# EAGLE board BMS ERROR Detection (EAGLE 8.6.2)
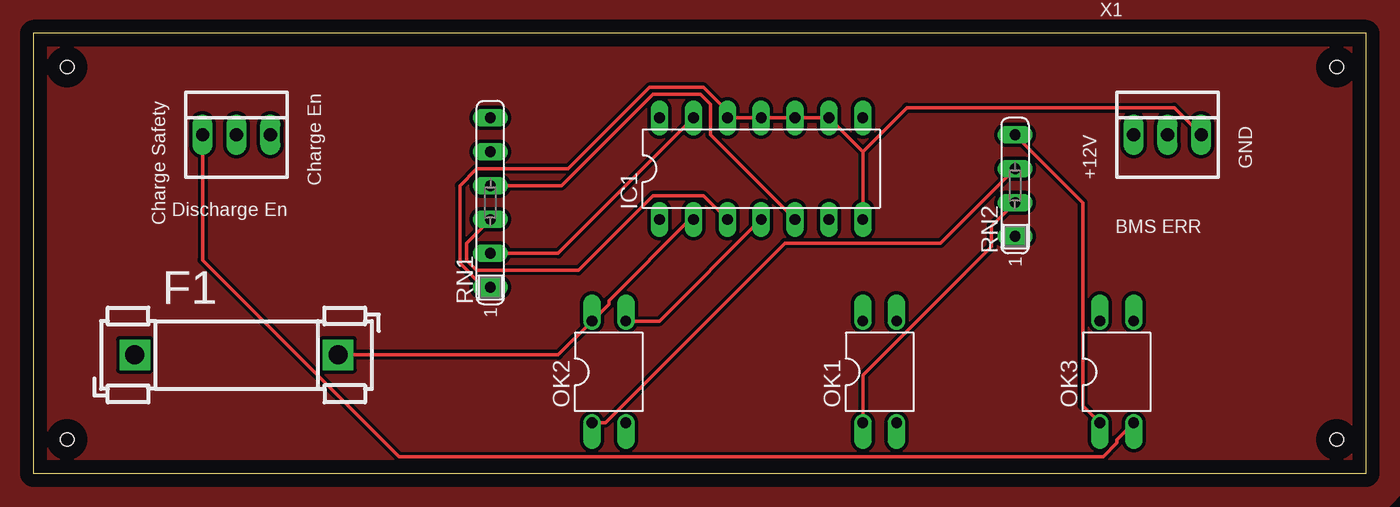
[diagram p0: board, top side]
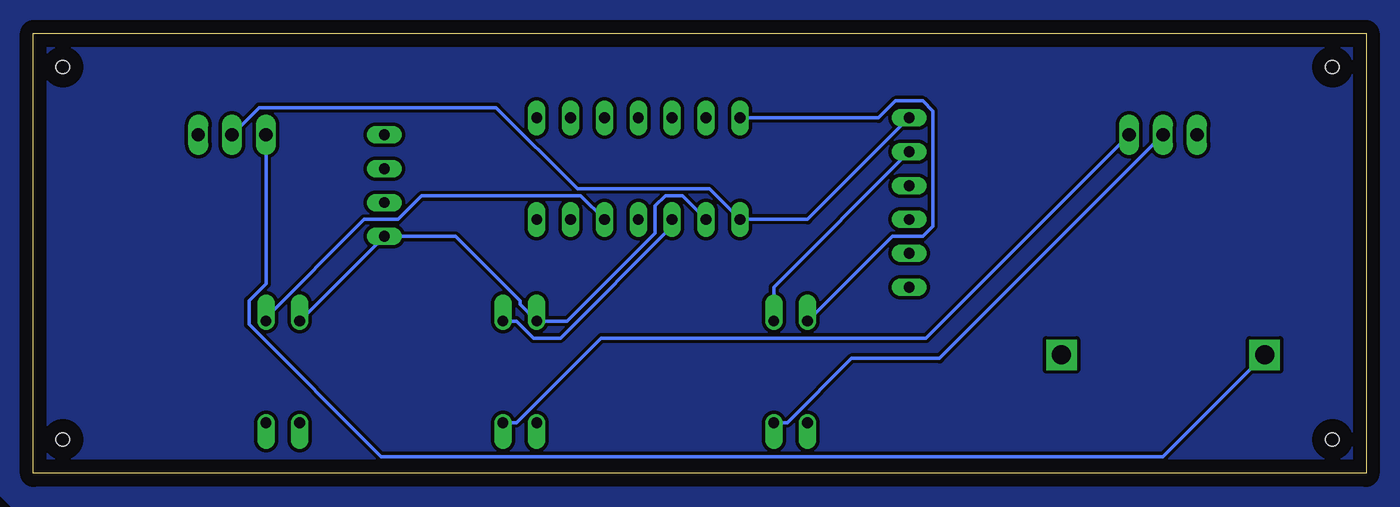
[diagram p1: board, bottom side, seen from below]

Size 100 x 33.01 mm. Coordinates in mm from the lower left corner, seen from the top.
Outline: 0,0 100,0 100,33.01 0,33.01 0,0
Copper layers (1*16): Top 0.035mm / dielectric 1.5mm / Bottom 0.035mm
Design rules "default *": minimum track width 10mil, minimum drill 0.35mm, track to track 10mil, track to pad 10mil, pad to pad 6mil, via to via 6mil, smd to smd 6mil, copper to edge 40mil, drill to drill 6mil, minimum pad ring 10mil, minimum via ring 8mil, stop-mask expansion 4mil, vias tented up to drill 0mil, thermal gap 10mil
Holes 1 mm at 2.54,30.48 2.54,2.54 97.79,2.54 97.79,30.48

## Footprints (pad centres in the part's own frame; a part is rotated, then mirrored left to right if it is on the bottom)
FUSE_HOLDER_5X20MM = drill 1.422 pad 2.286 square: 1 0,0; 2 15.24,0
DIL14 = drill 0.813 long: 1 -7.62,-3.81; 2 -5.08,-3.81; 3 -2.54,-3.81; 4 0,-3.81; 5 2.54,-3.81; 6 5.08,-3.81; 7 7.62,-3.81; 8 7.62,3.81; 9 5.08,3.81; 10 2.54,3.81; 11 0,3.81; 12 -2.54,3.81; 13 -5.08,3.81; 14 -7.62,3.81
DIL04 = drill 0.813 offset: 1 -1.27,-3.81; 2 1.27,-3.81; 3 1.27,3.81; 4 -1.27,3.81
SIL6 = drill 0.813 long: 1 -6.35,0; 2 -3.81,0; 3 -1.27,0; 4 1.27,0; 5 3.81,0; 6 6.35,0
SIL4 = drill 0.813 long: 1 -3.81,0; 2 -1.27,0; 3 1.27,0; 4 3.81,0
22-23-2031 = drill 1 long: 1 -2.54,0; 2 0,0; 3 2.54,0

## Placement (x,y rotation side)
F1  FUSEBLANK_5X20MM  [FUSE_HOLDER_5X20MM]  7.62,8.89 0 top
IC1  4082N  [DIL14]  54.61,22.86 0 top
OK1  TLP222A  [DIL04]  63.5,7.62 0 top
OK2  TLP222A  [DIL04]  43.18,7.62 0 top
OK3  TLP222A  [DIL04]  81.28,7.62 0 top
RN1  100k  [SIL6]  34.29,20.32 90 top
RN2  1k  [SIL4]  73.66,21.59 90 top
X1  22-23-2031  [22-23-2031]  85.09,25.4 0 top
X2  22-23-2031  [22-23-2031]  15.24,25.4 0 top

## Library data of the parts
F1 = fuse; OC_FARNELL: unknown; OC_NEWARK: unknown
IC1 = 40xx
OK1-OK3 = optocoupler; OC_FARNELL: unknown; OC_NEWARK: unknown
RN1 RN2 = resistor-sil; OC_FARNELL: unknown; OC_NEWARK: unknown
X1 X2 = con-molex; MF: MOLEX; MPN: 22-23-2031; OC_FARNELL: 1462950; OC_NEWARK: 30C0862

## Nets
+12V: F1.2 IC1.2 IC1.14 OK1.4 OK2.4 OK3.4 RN2.1
BMS: IC1.1 RN1.6 X1.2
BMS_ERR_1: IC1.3 OK1.3 RN1.3
BMS_ERR_2: IC1.4 OK2.3 RN1.5
BMS_ERR_3: IC1.5 OK3.3 RN1.4
CHARGE_EN: OK1.2 X2.3
CHARGE_SAFETY: OK3.2 X2.1
DISCHARGE_EN: OK2.2 X2.2
GND: IC1.7 IC1.9 IC1.10 IC1.11 IC1.12 RN1.1 X1.3
N$1: IC1.13 RN1.2
N$2: OK1.1 RN2.2
N$3: OK2.1 RN2.3
N$4: OK3.1 RN2.4
N$5: F1.1 X1.1

## Tracks (layer width: path | path; a pad name or v marks a point on that pad's centre or on a via)
+12V
  Top 0.254: IC1.2 49.28,19.05 43.18,12.95 43.18,12.7 OK2.4 39.37,8.89 F1.2
  Bottom 0.254: OK3.4 RN2.1 68.33,17.78 63.5,12.95 63.5,12.7 OK1.4 59.94,11.43 53.34,18.03 53.34,20.07 52.58,20.83 51.31,20.83 IC1.2 | IC1.14 36.58,26.67 35.31,27.94 33.27,27.94 32.51,27.18 32.51,18.54 33.27,17.78 35.56,17.78 OK2.4
BMS
  Bottom 0.254: RN1.6 41.91,19.05 IC1.1 49.28,21.34 59.18,21.34 65.28,27.43 83.06,27.43 X1.2
BMS_ERR_1
  Top 0.254: RN1.3 32.51,17.27 32.51,16 33.27,15.24 40.89,15.24 46.48,20.83 50.29,20.83 IC1.3
  Bottom 0.254: OK1.3 63.75,11.43 62.48,10.16 60.45,10.16 52.07,18.54 IC1.3
BMS_ERR_2
  Top 0.254: IC1.4 46.99,11.43 OK2.3
  Bottom 0.254: RN1.5 44.45,13.97 OK2.3
BMS_ERR_3
  Top 0.254: RN1.4 39.62,21.59 46.48,28.45 50.04,28.45 50.8,27.69 50.8,25.4 IC1.5
  Bottom 0.254: IC1.5 58.93,20.83 70.87,20.83 72.64,19.05 75.18,19.05 82.55,11.68 OK3.3
CHARGE_EN
  Bottom 0.254: OK1.2 63.75,3.81 57.4,10.16 33.02,10.16 X2.3
CHARGE_SAFETY
  Top 0.254: OK3.2 81.28,2.54 81.28,2.29 80.26,1.27 27.43,1.27 12.7,16 X2.1
DISCHARGE_EN
  Bottom 0.254: OK2.2 43.43,3.81 38.61,8.64 32,8.64 X2.2
GND
  Top 0.254: RN1.1 33.78,13.97 32,15.75 32,21.59 33.27,22.86 40.13,22.86 46.23,28.96 50.29,28.96 52.07,27.18 IC1.12 IC1.11 IC1.10 IC1.9 62.23,24.13 | 62.23,24.13 IC1.7 | X1.3 85.6,27.43 65.53,27.43 62.23,24.13
N$1
  Top 0.254: RN1.2 39.37,16.51 IC1.13
N$2
  Top 0.254: OK1.1 62.23,7.37 71.88,17.02 71.88,18.54 RN2.2
N$3
  Top 0.254: OK2.1 42.93,3.81 56.39,17.27 68.07,17.27 RN2.3
N$4
  Top 0.254: RN2.4 78.74,20.32 78.74,5.08 OK3.1
N$5
  Bottom 0.254: X1.1 82.55,14.22 83.82,12.95 83.82,11.18 73.91,1.27 15.24,1.27 F1.1
N$6
  pour Top: -3.81,38.1 -3.81,-3.81 100.33,-3.81 104.14,0 104.14,34.29 102.87,35.56 -1.27,35.56
N$7
  pour Bottom: -3.81,38.1 -3.81,-3.81 100.33,-3.81 104.14,0 104.14,34.29 102.87,35.56 -1.27,35.56

## Text on the board
tNames: Charge Safety | +12V | GND | Charge En | Discharge En | BMS ERR